# EAGLE board Pi_grammer_ADAPTER (EAGLE 7.6.0)
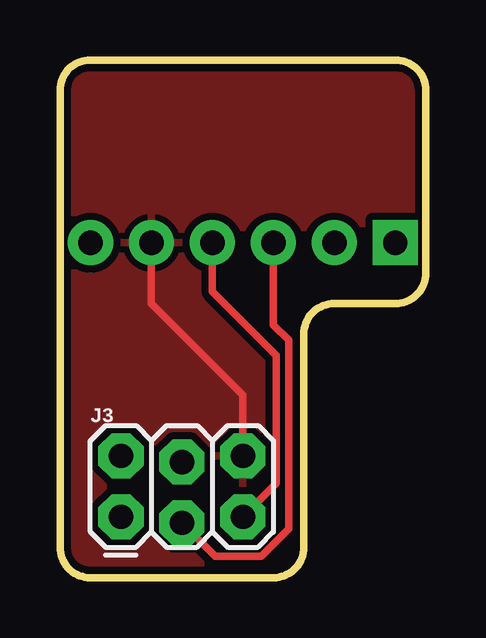
[diagram p0: board, top side]
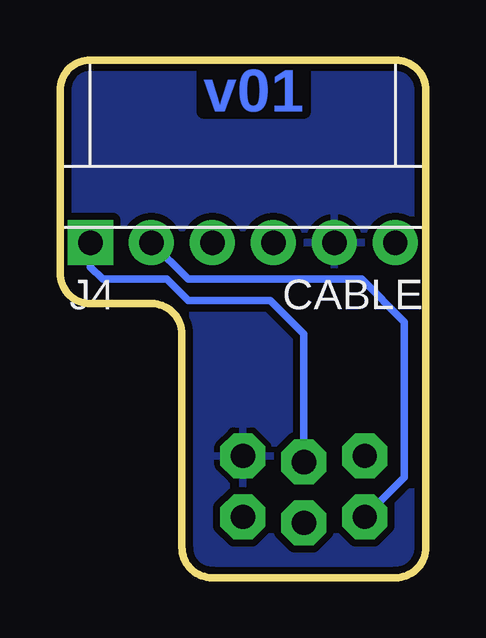
[diagram p1: board, bottom side, seen from below]

Size 15.24 x 21.59 mm. Coordinates in mm from the lower left corner, seen from the top.
Outline: 10.16,1.27 arc-90 8.89,0 1.27,0 arc-90 0,1.27 0,20.32 arc-90 1.27,21.59 13.97,21.59 arc-90 15.24,20.32 15.24,12.7 arc-90 13.97,11.43 11.43,11.43 arc90 10.16,10.16 10.16,1.27
Copper layers (1*16): Top 0.035mm / dielectric 1.5mm / Bottom 0.035mm
Design rules "SparkFun-2-layer *": minimum track width 12mil, minimum drill 20mil, track to track 8mil, track to pad 8mil, pad to pad 8mil, via to via 8mil, smd to smd 8mil, copper to edge 8mil, drill to drill 8mil, minimum pad ring 12mil, minimum via ring 10mil, stop-mask expansion 4mil, vias tented up to drill 20mil, thermal gap 10mil

## Footprints (pad centres in the part's own frame; a part is rotated, then mirrored left to right if it is on the bottom)
2X3_LOCK = drill 1.016 pad 1.88 octagon: 1 0,0; 2 0,2.54; 3 2.54,-0.254; 4 2.54,2.286; 5 5.08,0; 6 5.08,2.54
MOLEX-1X6-RA = drill 1.016 pad 1.88 square: 1 0,0 | drill 1.016 pad 1.88: 2 2.54,0; 3 5.08,0; 4 7.62,0; 5 10.16,0; 6 12.7,0

## Placement (x,y rotation side)
FRAME1  FRAME-LETTER  [CREATIVE_COMMONS]  -21.59,-12.7 0 top  (outside the outline)
J3  TESTBED  [2X3_LOCK]  2.54,2.54 0 top
J4  CABLE  [MOLEX-1X6-RA]  13.97,13.97 0 bottom

## Library data of the parts
FRAME1 = SparkFun-Aesthetics
J3 = SparkFun-Connectors; PROD_ID: CONN-11566
J4 = SparkFun-Connectors; PROD_ID: CONN-10140

## Nets
GND_C: J3.6 J4.5
MISO_C: J3.1 J4.2
MOSI_C: J3.4 J4.1
RST_C: J3.5 J4.4
SCK_C: J3.3 J4.3

## Tracks (layer width: path | path; a pad name or v marks a point on that pad's centre or on a via)
GND_C
  Top 0.305: J4.5 3.81,11.43 7.62,7.62 J3.6
  pour Bottom (isolate 0.305): 15.24,0 0,0 0,21.59 15.24,21.59
  pour Top (isolate 0.305): 15.24,0 0,0 0,21.59 15.24,21.59
MISO_C
  Bottom 0.305: J4.2 9.91,12.45 2.67,12.45 0.89,10.67 0.89,4.19 J3.1
MOSI_C
  Bottom 0.305: J4.1 13.97,12.95 13.46,12.45 10.79,12.45 9.91,11.56 6.48,11.56 5.08,10.16 J3.4
RST_C
  Top 0.305: J4.4 6.35,11.94 9.02,9.27 9.02,3.94 J3.5
SCK_C
  Top 0.305: J4.3 8.89,10.54 9.53,9.91 9.53,2.03 8.38,0.89 6.48,0.89 J3.3

## Text on the board
Bottom: v01
tDocu: Pete Lewis